# Altium PCB 1520 - 副本 (2).PcbDoc
Units mm, origin at the board's own origin, x right, y up, seen from the top; angles counter-clockwise.
Board outline 200.03 x 150.11 mm, 2 copper layers (Top Layer, Bottom Layer); 34 components, 45 nets, 202 pads, 47 vias.
Unrouted connection lines stored in the file: 2.
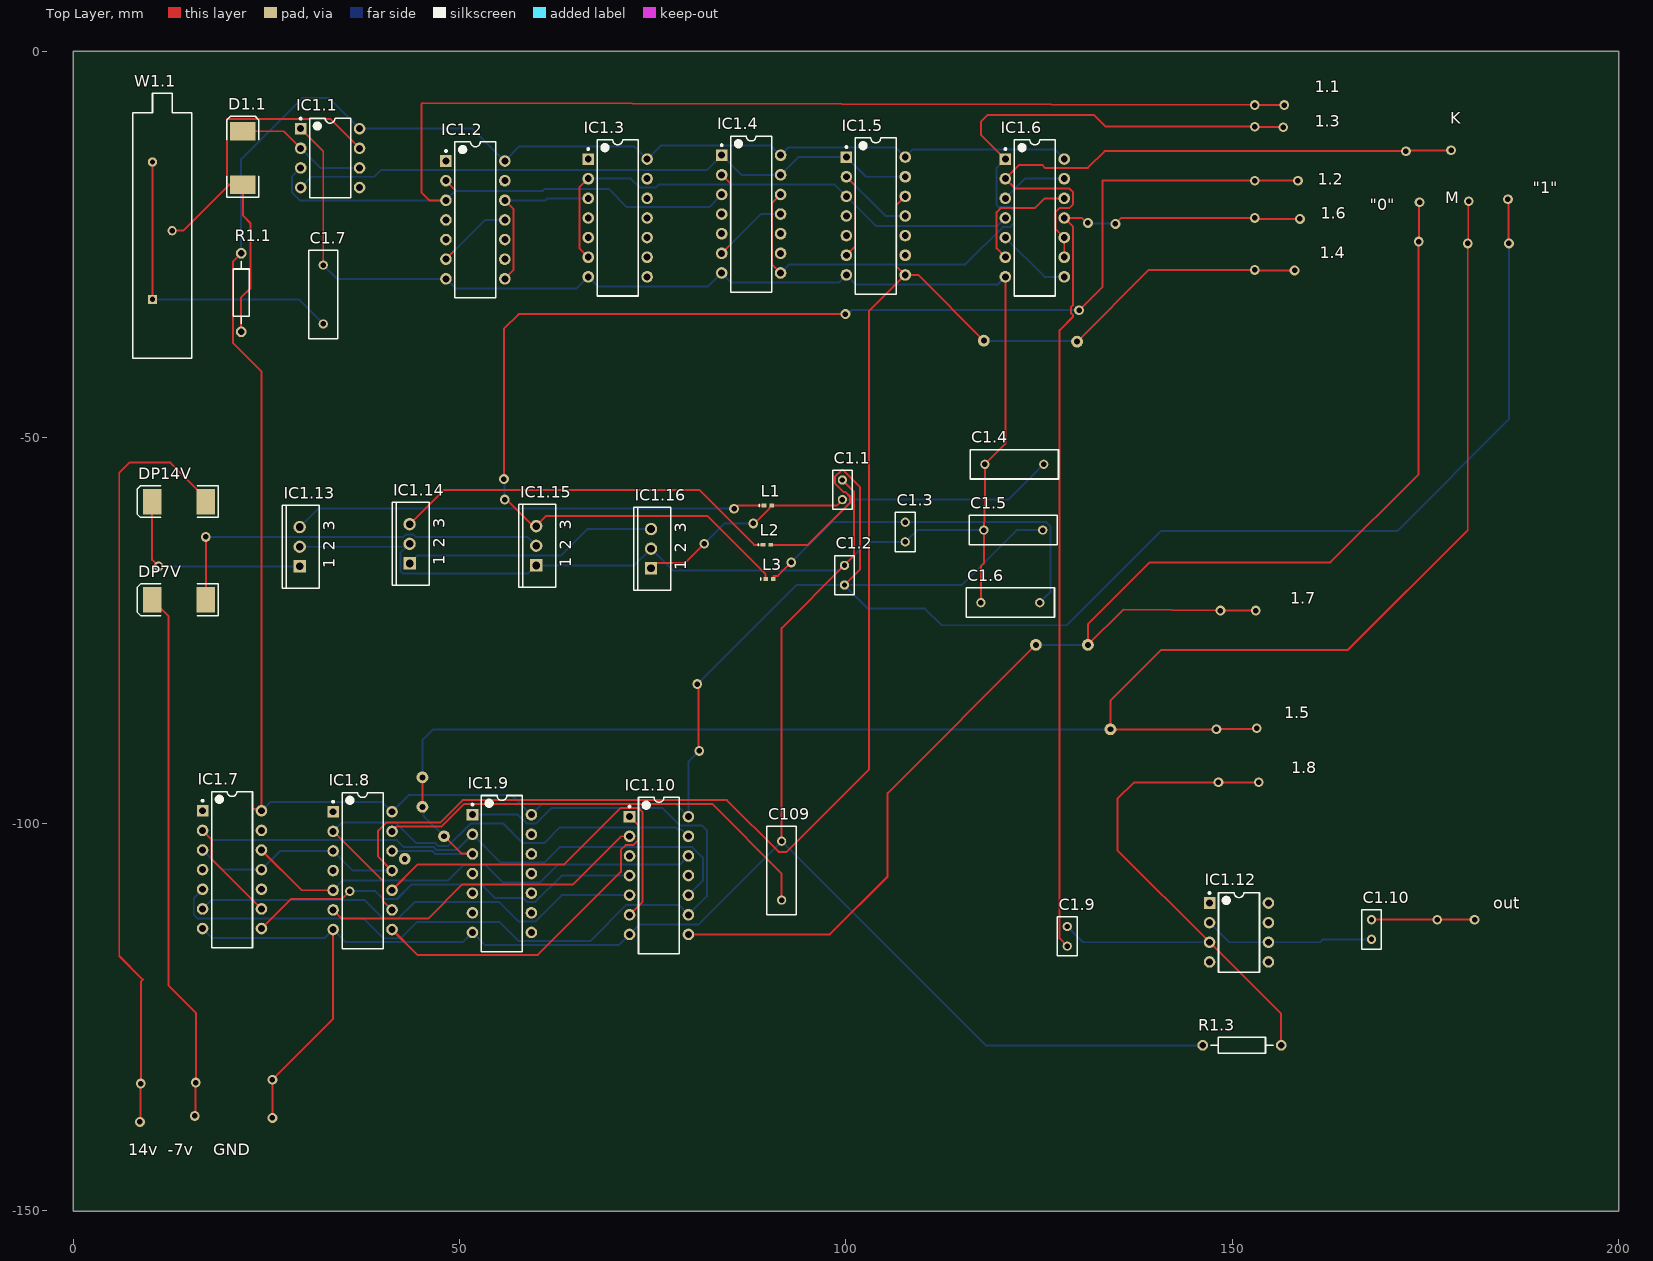
[diagram p0: Top Layer view]
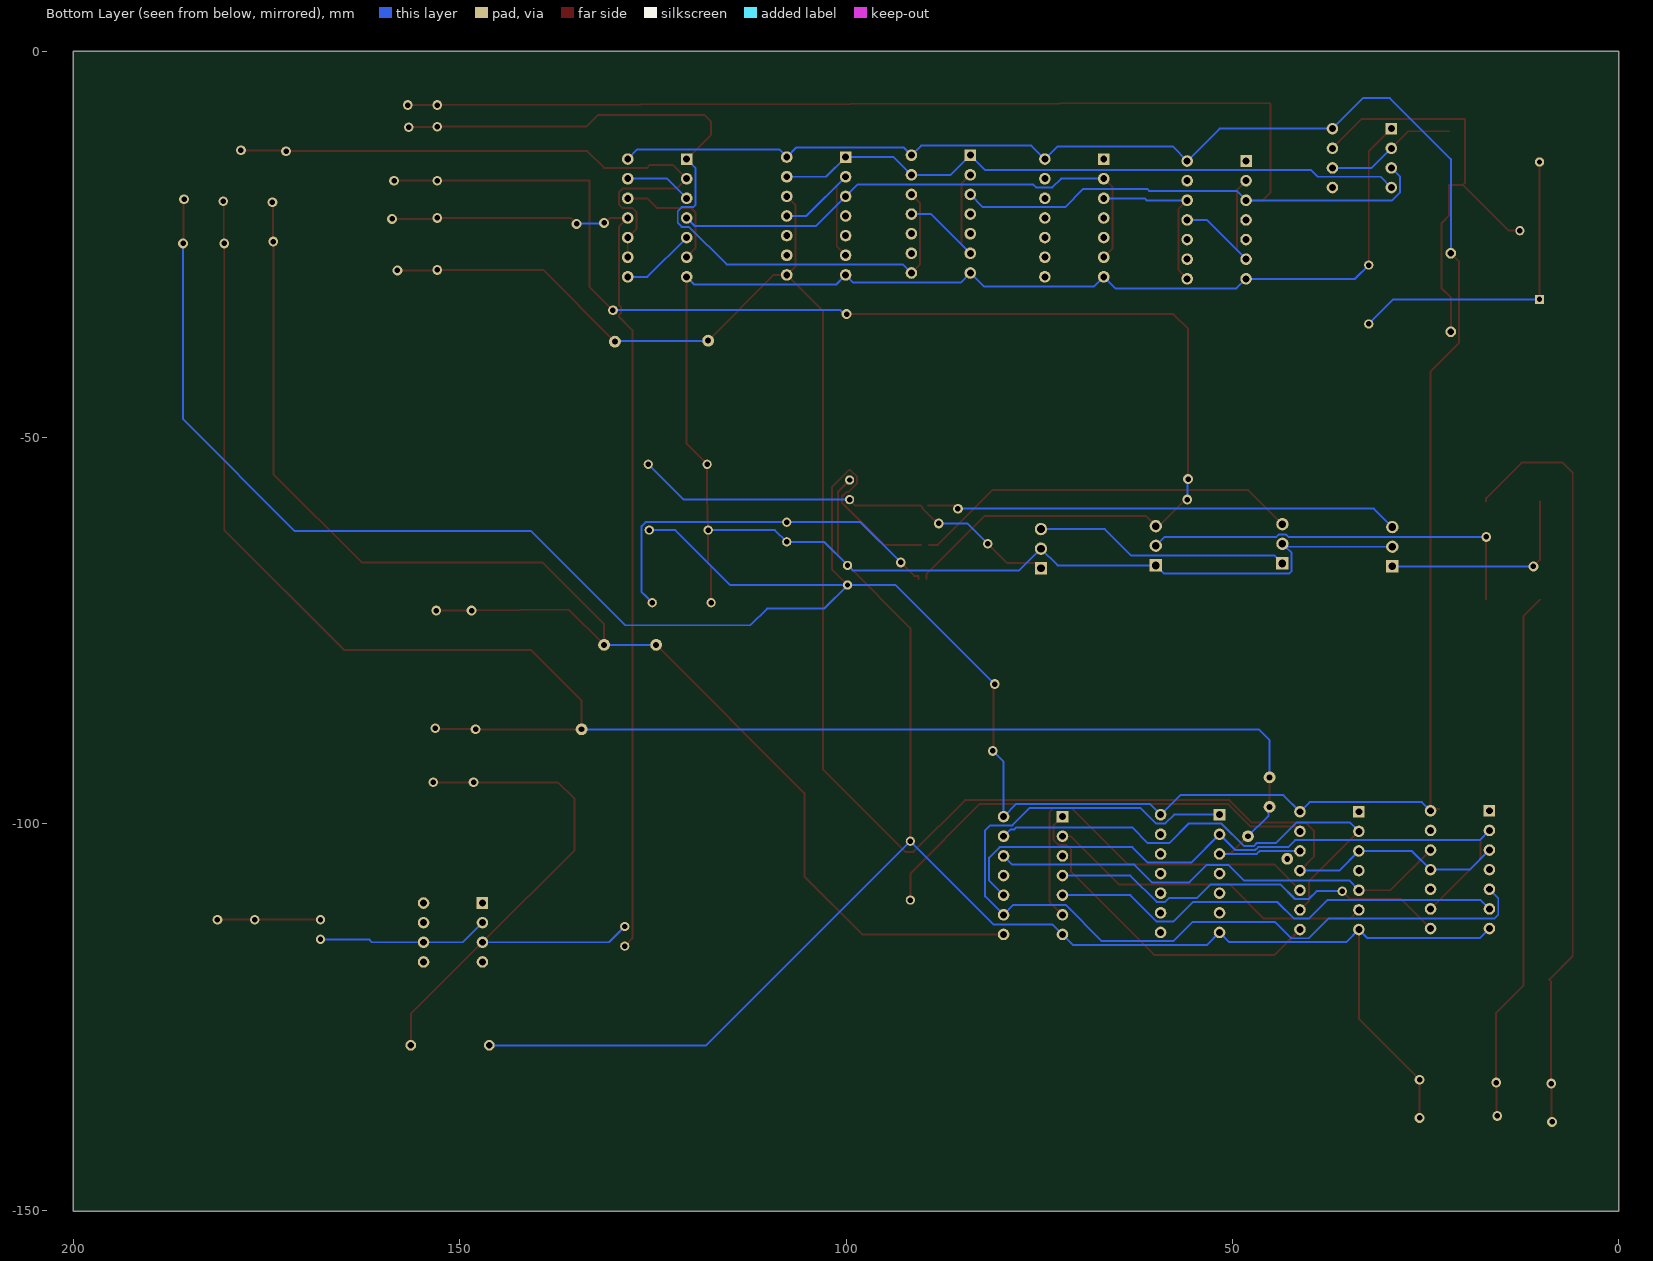
[diagram p1: Bottom Layer view, seen from below]

## Layer stack, top to bottom
Top Solder: solder mask 0.0102, Solder Resist, Dk 3.5
Top Layer: signal copper 0.0356
Dielectric 1: dielectric 0.32, FR-4, Dk 4.8
Bottom Layer: signal copper 0.0356
Bottom Solder: solder mask 0.0102, Solder Resist, Dk 3.5

## Board outline
0,-150.114 0,0 200.025,0 200.025,-0.127 200.025,-150.114

## Design rules (kind name [scope] priority, off if disabled: settings)
Clearance [All] p1: gap=0.254 ignorepadtopadclearanceinfootprint=FALSE except(0: Arc-Hole Track-Hole SMDPad-Hole THPad-Hole Via-Hole Fill-Hole Poly-Hole Region-Hole Text-Hole)
PolygonConnect [All] p1: connectstyle=Relief reliefconductorwidth=0.254 reliefentries=4 polygonreliefangle="90 Angle" airgapwidth=0.254
RoutingVias [All] p1: holewidth=0.711 width=1.27 viastyle="Through Hole" minholewidth=0.711 minwidth=1.27 maxholewidth=0.711 maxwidth=1.27
SolderMaskExpansion [All] p1: expansion=0.102
Width [All] p1: maxlimit=0.254 minlimit=0.254 preferedwidth=0.254
30 further rules are at their usual default settings.

## Components (designator, comment, footprint, x,y, rotation, side; value= is the part's Value field where it differs from the comment)
C1.1 "47" RAD-0.1 99.551,-56.769 r90 top
C1.2 "47" RAD-0.1 99.813,-67.818 r90 top
C1.3 "47" RAD-0.1 107.679,-62.23 r90 top
C1.4 "Cap" RAD-0.3 121.793,-53.467 r180 top value=0.1UF
C1.5 "Cap" RAD-0.3 121.657,-61.976 r180 top value=0.1uf
C1.6 "Cap" RAD-0.3 121.276,-71.374 r180 top value=0.1uf
C1.7 "Cap" RAD-0.3 32.368,-31.496 r90 top value=0.022
C1.9 "10.0" RAD-0.1 128.642,-114.546 r90 top
C1.10 "10.0" RAD-0.1 168.012,-113.665 r90 top
C109 "Cap" RAD-0.3 91.685,-106.045 r90 top value=0.1
D1.1 "Diode" SMC 21.954,-13.843 r90 top
DP7V "Diode" SMC 13.699,-70.993 r180 top
DP14V "Diode" SMC 13.699,-58.293 r180 top
IC1.1 "NE555" DIP-8 33.257,-13.843 r0 top
IC1.2 "74LS74" DIP-14 52.053,-21.844 r0 top
IC1.3 "74LS74" DIP-14 70.468,-21.59 r0 top
IC1.4 "74LS74" DIP-14 87.74,-21.09 r0 top
IC1.5 "74LS74" DIP-14 103.869,-21.336 r0 top
IC1.6 "74LS00" DIP-14 124.443,-21.59 r0 top
IC1.7 "74LS74" DIP-14 20.565,-105.918 r0 top
IC1.8 "74LS74" DIP-14 37.456,-106.045 r0 top
IC1.9 "74LS86" DIP-14 55.49,-106.426 r0 top
IC1.10 "74LS20" DIP-14 75.81,-106.68 r0 top
IC1.12 "741" DIP-8 150.867,-114.046 r0 top
IC1.13 "MC7812T" TO-220-AB 29.32,-64.135 r90 top
IC1.14 "MC7805T" TO-220-AB 43.544,-63.754 r90 top
IC1.15 "MC7905T" TO-220-AB 59.927,-64.008 r90 top
IC1.16 "MC7805T" TO-220-AB 74.786,-64.389 r90 top
L1 "Inductor" 0402-A 89.907,-58.801 r0 top value=68uh
L2 "Inductor" 0402-A 89.78,-63.881 r0 top value=68uh
L3 "Inductor" 0402-A 90.107,-68.326 r0 top value=68uh
R1.1 "Res2" AXIAL-0.4 21.754,-31.242 r90 top value=3.6K
R1.3 "" AXIAL-0.4 151.248,-128.651 r180 top value=27K
W1.1 "4.7K" VR3 11.54,-23.241 r90 top

## Footprints (in the part's own frame and the unit in brackets; to place one, negate y for a bottom-side part, rotate by r counter-clockwise, add the part's x,y. Pads: shape width x height; smd on the part's side, far side on the other; paste and mask are expansions set on the pad)
0402-A [mm] "Chip Inductor, Body 1.0x0.5mm, IPC High Density"
  rect 0.6x0.5 smd: 1(-0.5,0) 2(0.5,0)
  silkscreen extent -1.1,-0.15 -1.1,0.15, body extent -0.55,-0.3 0.55,0.3, height 0.55
AXIAL-0.4 [mm] "Axial Device, Thru-Hole; 2 Leads; 0.4 in Pin Spacing"
  round 1.4 hole 0.85: 1(-5.08,0) 2(5.08,0)
  silkscreen extent -4.06,-1.02 4.06,1.02
DIP-8 [mm] "DIP; 8 Leads; Row Spacing 7.62 mm; Pitch 2.54 mm"
  rect 1.5x1.5 hole 0.9: 1(-3.81,3.81)
  round 1.5 hole 0.9: 2(-3.81,1.27) 3(-3.81,-1.27) 4(-3.81,-3.81) 5(3.81,-3.81) 6(3.81,-1.27) 7(3.81,1.27) 8(3.81,3.81)
  silkscreen extent -3.93,-5.15 2.65,5.23, body extent -3.6,-5.15 3.6,5.15, height 5.08
DIP-14 [mm] "DIP; 14 Leads; Row Spacing 7.62 mm; Pitch 2.54 mm"
  rect 1.5x1.5 hole 0.9: 1(-3.81,7.62)
  round 1.5 hole 0.9: 2(-3.81,5.08) 3(-3.81,2.54) 4(-3.81,0) 5(-3.81,-2.54) 6(-3.81,-5.08) 7(-3.81,-7.62) 8(3.81,-7.62) 9(3.81,-5.08) 10(3.81,-2.54) 11(3.81,0) 12(3.81,2.54) 13(3.81,5.08) 14(3.81,7.62)
  silkscreen extent -3.93,-10.1 2.65,10.1, body extent -3.6,-10.1 3.6,10.1, height 5.08
RAD-0.1 [mm] "Radial Cap, Thru-Hole; 2 Leads; 0.1 in Pin Spacing"
  round 1.2 hole 0.7: 1(-1.27,0) 2(1.27,0)
  silkscreen extent -2.54,-1.27 2.54,1.27
RAD-0.3 [mm] "Radial Cap, Thru-Hole; 2 Leads; 0.3 in Pin Spacing"
  round 1.2 hole 0.7: 1(-3.81,0) 2(3.81,0)
  silkscreen extent -5.71,-1.91 5.72,1.91
SMC [mm] "DO-214-AB/SMC; 2 C-Bend Leads; Body 7.9 x 5.9 mm, inc. leads (LxW)"
  rect 2.4x3.3 smd: 1(-3.475,0) 2(3.475,0)
  silkscreen extent -5.08,-2.05 5.42,2.05
TO-220-AB [mm] "TO, Thru-Hole, Vertical, Heatsink Mounted; 3 In-Line Leads; Pitch 2.54 mm"
  rect 1.6x1.6 hole 1: 1(-2.54,0)
  round 1.6 hole 1: 2(0,0) 3(2.54,0)
  silkscreen extent -5.35,-2.55 5.35,2.25
VR3 [mm] "Thru-Hole; 3 Leads"
  rect 1.2x1.2 hole 0.7: 1(-8.89,1.27)
  round 1.2 hole 0.7: 2(0,-1.27) 3(8.89,1.27)
  silkscreen extent -16.51,-3.81 17.78,3.81

## Part data
C1.1 C1.2 C1.3 C1.9 C1.10: library part ELECTRO1, "Electrolytic Capacitor"
C1.4 C1.5 C1.6 C1.7 C109: "Capacitor", LatestRevisionDate=17-Jul-2002, LatestRevisionNote="Re-released for DXP Platform.", PackageDescription="Radial Cap, Thru-Hole; 2 Leads; 0.3 in Pin Spacing", PackageReference=RAD-0.3, Published=8-Jun-2000, Publisher="Altium Limited"
D1.1 DP7V DP14V: "Default Diode", Code_JEDEC=DO-214-AB, LatestRevisionDate=17-Jul-2002, LatestRevisionNote="Re-released for DXP Platform.", PackageDescription="DO-214-AB/SMC; 2 C-Bend Leads; Body 7.9 x 5.9 mm, inc. leads (LxW)", PackageReference=SMC, PackageVersion=Sep-1996, Published=8-Jun-2000, Publisher="Altium Limited"
IC1.1: library part 555
R1.1: "Resistor", LatestRevisionDate=17-Jul-2002, LatestRevisionNote="Re-released for DXP Platform.", PackageDescription="Axial Device, Thru-Hole; 2 Leads; 0.4 in Pin Spacing", PackageReference=AXIAL-0.4, Published=8-Jun-2000, Publisher="Altium Limited"
R1.3: library part Res2, "Resistor", LatestRevisionDate=17-Jul-2002, LatestRevisionNote="Re-released for DXP Platform.", PackageDescription="Axial Device, Thru-Hole; 2 Leads; 0.4 in Pin Spacing", PackageReference=AXIAL-0.4, Published=8-Jun-2000, Publisher="Altium Limited"
W1.1: library part POT2, "Potentiometer"
L1 L2 L3: Code_IEC=1005, Code_JEITA=0402, LatestRevisionDate=29-May-2009, LatestRevisionNote="IPC-7351 Footprint Added.", PackageDescription="Chip Inductor", PackageReference=0402-A, Published=8-Jun-2000, Publisher="Altium Limited"

## Free pads (board coordinates)
  round 1.524 hole 0.762: 3(117.847,-37.465) 4(129.912,-37.592) 5(42.917,-104.521) 6(134.23,-87.757) 7(47.997,-101.6) 8(45.203,-97.79) 9(45.203,-93.98) 19(124.587,-76.835) 20(131.318,-76.835)

## Via types
v1: diameter 1.27, hole 0.711, Top Layer to Bottom Layer, 47 vias

## Nets (pads, with @x,y where several pads share a name; then routed paths per layer and width w, separated by ;. In a path a pad name is that pad's centre, name@x,y a point inside that pad or via, vN(x,y) a via of type N, cw(c..) or ccw(c..) an arc to the next point about the centre after c; other vN are vias at no path point)
+12: 
+14: DP14V.1 | length 99.5
  Top Layer w0.254: v1(8.636,-138.557) 8.7,-138.493 8.7,-133.667 v1(8.763,-133.604) 8.763,-120.396 9.017,-120.142 5.969,-117.094 5.969,-54.541 7.268,-53.242 12.573,-53.242 17.174,-57.843 DP14V.1
-7: DP7V.2 | length 69.2
  Top Layer w0.254: DP7V.2 12.319,-73.088 12.319,-120.904 15.875,-124.46 v1(15.875,-133.477) 15.811,-133.541 15.811,-137.731 v1(15.748,-137.795)
GND: C1.1.2 C1.2.2 C1.3.1 C1.4.2 C1.5.2 C1.6.2 C1.7.2 C109.2 IC1.1.1 IC1.2.7 IC1.3.7 IC1.4.7 IC1.5.7 IC1.6.7 IC1.7.7 IC1.8.7 IC1.9.7 IC1.10.7 IC1.10.8 IC1.13.2 IC1.14.2 IC1.15.1 IC1.16.2 pad.19 pad.20 R1.3.2 | length 667.2
  Top Layer w0.254: v1(25.781,-138.049) v1(25.781,-133.096) 33.646,-125.231 IC1.8.7 ; IC1.1.1 32.368,-12.954 C1.7.2 ; IC1.10.8 97.917,-114.3 105.41,-106.807 105.41,-96.012 pad.19 ; C109.2 91.685,-74.676 C1.2.2 101.04,-65.321 101.04,-56.988 C1.1.2 ; C1.6.2 117.466,-66.675 117.847,-66.294 C1.5.2 117.983,-57.598 C1.4.2 120.633,-50.817 IC1.6.7 ; v1(153.035,-72.39) v1(148.463,-72.39) 135.89,-72.263 pad.20 131.318,-74.168 139.319,-66.167 162.687,-66.167 174.117,-54.737 v1(174.117,-24.638) 174.18,-24.575 174.18,-19.621 v1(174.244,-19.558)
  Bottom Layer w0.254: IC1.7.7 18,-114.783 32.528,-114.783 IC1.8.7 35.285,-115.304 50.422,-115.304 IC1.9.7 53.319,-115.685 70.615,-115.685 IC1.10.7 73.27,-113.03 80.89,-113.03 C109.2 118.101,-128.651 R1.3.2 ; IC1.13.2 IC1.14.2@43.163,-64.135 ; C1.7.2 34.146,-29.464 IC1.2.7 49.488,-30.709 65.159,-30.709 IC1.3.7 67.903,-30.455 82.185,-30.455 IC1.4.7 85.167,-29.947 99.068,-29.947 IC1.5.7 101.304,-30.201 119.642,-30.201 IC1.6.7 ; IC1.14.2 IC1.14.2@43.163,-64.135 ; C1.5.2 109.203,-61.976 C1.3.1 102.861,-63.5 C1.2.2 99.165,-67.196 77.593,-67.196 IC1.16.2 72.627,-66.548 IC1.15.1 58.886,-67.589 42.638,-67.589 42.358,-67.31 42.358,-64.94 IC1.14.2@43.163,-64.135 ; pad.19 pad.20
NetC1.1_1: C1.1.1 C1.4.1 IC1.16.1 L1.2 | length 56.5
  Top Layer w0.254: IC1.16.1 75.459,-66.256 79.159,-66.256 v1(81.661,-63.754) ; v1(88.014,-61.117) 88.18,-61.117 90.088,-59.209 90.088,-59.07 90.357,-58.801 L1.2 98.789,-58.801 C1.1.1
  Bottom Layer w0.254: v1(81.661,-63.754) 84.298,-61.117 v1(88.014,-61.117) ; C1.1.1 121.031,-58.039 C1.4.1
NetC1.2_1: 
NetC1.3_2: C1.3.2 C1.6.1 L3.2 | length 49.8
  Top Layer w0.254: L3.2 90.607,-67.905 91.191,-67.905 v1(92.93,-66.167)
  Bottom Layer w0.254: v1(92.93,-66.167) 98.137,-60.96 C1.3.2 125.95,-60.96 126.458,-61.468 126.458,-70.002 125.95,-70.51 C1.6.1
NetC1.7_1: C1.7.1 W1.1.1 W1.1.3 | length 41.2
  Top Layer w0.254: W1.1.1 W1.1.3
  Bottom Layer w0.254: W1.1.1 29.193,-32.131 C1.7.1
NetC1.9_1: C1.9.1 IC1.6.11 | length 127.3
  Top Layer w0.254: C1.9.1 127.651,-114.825 127.651,-36.093 129.404,-34.341 129.404,-34.203 129.15,-33.949 129.15,-33.107 129.404,-32.853 129.404,-22.741 IC1.6.11 130.519,-21.59 131.154,-22.225 v1(131.321,-22.225) ; v1(134.874,-22.352) 135.636,-21.59 v1@152.781,-21.59 ; v1@152.4,-21.653 v1@152.463,-21.59 ; v1@152.4,-21.59 v1@152.463,-21.653 ; v1(152.908,-21.59) 153.035,-21.717 v1(158.75,-21.717)
  Bottom Layer w0.254: v1(131.321,-22.225) 131.385,-22.288 134.81,-22.288 v1(134.874,-22.352)
NetC1.9_2: C1.9.2 IC1.12.3 R1.3.1 | length 79.1
  Top Layer w0.254: v1(153.416,-94.615) v1(148.209,-94.615) 137.287,-94.615 135.128,-96.774 135.128,-103.387 IC1.12.3 156.328,-124.587 R1.3.1
  Bottom Layer w0.254: C1.9.2 130.682,-115.316 IC1.12.3
NetC1.10_1: C1.10.1 IC1.12.2 IC1.12.6 | length 22.2
  Bottom Layer w0.254: IC1.12.2 149.597,-115.316 IC1.12.6 161.357,-115.316 161.738,-114.935 C1.10.1
NetC1.10_2: C1.10.2 | length 13.3
  Top Layer w0.254: C1.10.2 v1(176.53,-112.395) v1(181.356,-112.395)
NetC109_1: C109.1 IC1.8.13 | length 59
  Top Layer w0.254: IC1.8.13 41.901,-100.33 47.699,-100.33 50.608,-97.421 82.68,-97.421 91.685,-106.426 C109.1
NetD1.1_1: D1.1.1 IC1.1.7 R1.1.1 W1.1.2 | length 58.9
  Top Layer w0.254: W1.1.2 14.261,-23.241 20.184,-17.318 ; R1.1.1 21.754,-31.856 22.953,-30.658 22.953,-22.258 21.954,-21.26 D1.1.1 20.184,-17.318 ; IC1.1.7 33.257,-8.763 19.905,-8.763 19.905,-17.039 20.184,-17.318
NetD1.1_2: D1.1.2 IC1.1.2 IC1.1.6 | length 17.1
  Top Layer w0.254: D1.1.2 27.242,-10.368 IC1.1.2
  Bottom Layer w0.254: IC1.1.2 31.987,-15.113 IC1.1.6
NetDP7V_1: DP7V.1 IC1.15.2 | length 51.6
  Top Layer w0.254: DP7V.1 v1(17.174,-62.865)
  Bottom Layer w0.254: v1(17.174,-62.865) 42.763,-62.865 43.055,-62.573 44.033,-62.573 44.325,-62.865 58.784,-62.865 IC1.15.2
NetDP14V_2: DP14V.2 IC1.13.1 | length 27
  Top Layer w0.254: DP14V.2 10.224,-65.834 v1(11.065,-66.675)
  Bottom Layer w0.254: v1(11.065,-66.675) IC1.13.1
NetIC1.1_3: IC1.1.3 IC1.2.3 IC1.4.3 | length 188.7
  Top Layer w0.254: IC1.2.3 46.092,-19.304 45.076,-18.288 45.076,-6.858 45.225,-6.709 153.67,-6.985 v1(156.718,-6.985)
  Bottom Layer w0.254: IC1.1.3 28.312,-16.248 28.312,-18.288 29.328,-19.304 IC1.2.3 49.462,-18.085 60.799,-18.085 61.053,-17.831 69.307,-17.831 71.657,-20.181 82.299,-20.181 IC1.4.3
  other v1: 152.908,-6.985
NetIC1.1_4: IC1.1.4 IC1.4.1 IC1.4.13 IC1.5.1 IC1.5.13 | length 83
  Bottom Layer w0.254: IC1.1.4 30.844,-16.256 38.955,-16.256 39.844,-15.367 82.033,-15.367 IC1.4.1 86.47,-16.01 IC1.4.13 93.844,-13.716 IC1.5.1 102.599,-16.256 IC1.5.13
NetIC1.2_2: IC1.2.2 IC1.2.6 IC1.2.11 | length 20.8
  Top Layer w0.254: IC1.2.6 49.394,-25.773 49.394,-17.915 IC1.2.2
  Bottom Layer w0.254: IC1.2.6 53.323,-21.844 IC1.2.11
NetIC1.2_8: IC1.2.8 IC1.2.12 IC1.3.3 | length 22
  Top Layer w0.254: IC1.2.8 57.014,-28.313 57.014,-20.455 IC1.2.12
  Bottom Layer w0.254: IC1.2.12 61.129,-19.304 61.383,-19.05 IC1.3.3
NetIC1.3_2: IC1.3.2 IC1.3.6 IC1.5.3 IC1.6.4 | length 68.3
  Top Layer w0.254: IC1.3.6 65.523,-25.535 65.523,-17.645 IC1.3.2
  Bottom Layer w0.254: IC1.3.2 72.178,-16.51 73.309,-17.641 75.404,-17.641 75.773,-17.272 98.535,-17.272 IC1.5.3 103.869,-22.606 119.617,-22.606 IC1.6.4
NetIC1.4_2: IC1.4.2 IC1.4.6 IC1.4.11 | length 20.8
  Top Layer w0.254: IC1.4.6 85.081,-25.019 85.081,-17.161 IC1.4.2
  Bottom Layer w0.254: IC1.4.6 89.01,-21.09 IC1.4.11
NetIC1.4_8: IC1.4.8 IC1.4.12 IC1.6.1 | length 100.9
  Top Layer w0.254: IC1.4.8 90.415,-27.575 90.415,-19.685 IC1.4.12 ; IC1.6.1 117.458,-10.795 117.458,-9.152 118.355,-8.255 132.071,-8.255 133.595,-9.779 v1@152.4,-9.779 ; v1@152.463,-9.842 v1@152.4,-9.779 ; v1@153.28,-9.779 v1(152.908,-9.779) v1@152.4,-9.779 ; v1@153.344,-9.842 153.407,-9.906 153.471,-9.842 v1(156.591,-9.842)
  Bottom Layer w0.254: IC1.4.8 92.65,-27.61 115.459,-27.61 120.336,-22.733 121.276,-22.733 121.784,-22.225 121.784,-20.701 121.276,-20.193 119.752,-20.193 119.498,-19.939 119.498,-15.105 IC1.6.1
NetIC1.5_2: IC1.5.2 IC1.5.6 IC1.5.11 | length 20.8
  Top Layer w0.254: IC1.5.6 101.21,-25.265 101.21,-17.407 IC1.5.2
  Bottom Layer w0.254: IC1.5.2 105.139,-21.336 IC1.5.11
NetIC1.5_8: IC1.5.8 IC1.5.12 IC1.7.3 IC1.7.11 IC1.8.3 IC1.8.11 pad.3 pad.4 | length 240.8
  Top Layer w0.254: IC1.8.11 39.463,-104.242 39.463,-100.863 40.504,-99.822 47.489,-99.822 50.398,-96.913 84.585,-96.913 91.304,-103.632 92.32,-103.632 103.013,-92.939 103.013,-33.622 IC1.5.8 ; IC1.5.12 106.544,-19.931 106.544,-27.821 IC1.5.8 ; pad.3 109.338,-28.956 IC1.5.8 ; pad.4 139.183,-28.321 v1@153.289,-28.321 ; v1@152.4,-28.321 v1@152.463,-28.384 ; v1@153.352,-28.384 v1(158.052,-28.384)
  Bottom Layer w0.254: IC1.7.3 19.295,-105.918 IC1.7.11 26.788,-103.505 IC1.8.3 36.186,-106.045 IC1.8.11 ; pad.3 117.911,-37.529 129.849,-37.529 pad.4
  other v1: 152.908,-28.321
NetIC1.6_2: IC1.6.2 IC1.6.9 IC1.6.10 | length 79.6
  Top Layer w0.254: IC1.6.9 IC1.6.10 127.118,-22.995 127.118,-20.828 127.626,-20.32 128.896,-20.32 129.404,-19.812 129.404,-18.288 128.896,-17.78 121.903,-17.78 IC1.6.2 122.411,-14.732 125.382,-14.732 125.751,-15.101 131.321,-15.101 133.468,-12.954 v1(172.466,-12.954) 172.529,-12.89 178.244,-12.89 v1(178.308,-12.827)
NetIC1.6_3: IC1.6.3 IC1.6.13 | length 8.7
  Bottom Layer w0.254: IC1.6.3 123.173,-16.51 IC1.6.13
NetIC1.6_5: IC1.6.5 IC1.6.8 | length 9.7
  Bottom Layer w0.254: IC1.6.5 125.713,-29.21 IC1.6.8
NetIC1.6_6: IC1.6.6 IC1.6.12 | length 15.8
  Top Layer w0.254: IC1.6.6 119.498,-25.535 119.498,-20.828 120.006,-20.32 124.451,-20.32 125.721,-19.05 IC1.6.12
NetIC1.7_2: IC1.7.2 IC1.7.9 IC1.9.2 IC1.10.10 | length 88.5
  Top Layer w0.254: IC1.7.2 17.898,-101.981 17.898,-104.521 IC1.7.9
  Bottom Layer w0.254: IC1.7.2 18.025,-102.108 41.909,-102.108 42.798,-102.997 46.683,-102.997 47.064,-103.378 49.648,-103.378 IC1.9.2 55.351,-105.017 60.939,-105.017 62.959,-102.997 80.128,-102.997 81.5,-104.369 81.5,-107.34 IC1.10.10
NetIC1.7_5: IC1.7.5 IC1.9.1 IC1.10.9 | length 118.2
  Bottom Layer w0.254: IC1.7.5 15.612,-109.601 15.612,-111.76 16.12,-112.268 37.607,-112.268 40.135,-114.796 42.397,-114.796 44.519,-112.674 55.158,-112.674 57.661,-115.177 66.907,-115.177 71.594,-110.49 78.35,-110.49 IC1.10.9 82.008,-109.372 82.008,-100.826 81.373,-100.191 78.477,-100.191 76.215,-97.929 61.93,-97.929 59.922,-99.937 58.678,-99.937 57.547,-98.806 IC1.9.1
NetIC1.7_6: IC1.7.6 IC1.10.5 | length 60.1
  Bottom Layer w0.254: IC1.7.6 17.898,-109.855 37.734,-109.855 40.135,-112.256 42.028,-112.256 44.175,-110.109 55.133,-110.109 57.661,-112.637 59.808,-112.637 63.225,-109.22 IC1.10.5
NetIC1.7_8: IC1.7.8 IC1.10.4 | length 53.2
  Top Layer w0.254: IC1.7.8 28.185,-109.728 34.789,-109.728 v1(35.805,-108.712)
  Bottom Layer w0.254: v1(35.805,-108.712) 39.119,-108.712 40.123,-109.716 41.913,-109.716 43.794,-107.835 52.823,-107.835 54.564,-109.576 58.182,-109.576 58.704,-110.097 59.808,-110.097 63.225,-106.68 IC1.10.4
NetIC1.7_12: IC1.7.12 IC1.8.5 IC1.10.12 | length 61.1
  Top Layer w0.254: IC1.7.12 29.582,-108.585 IC1.8.5
  Bottom Layer w0.254: IC1.8.5 34.916,-107.315 48.529,-107.315 50.549,-105.295 53.319,-105.295 55.581,-107.557 60.431,-107.557 62.705,-105.283 78.477,-105.283 IC1.10.12
NetIC1.8_2: IC1.8.2 IC1.8.9 IC1.10.13 | length 64.6
  Top Layer w0.254: IC1.8.2 40.123,-107.442 40.123,-109.982 IC1.8.9
  Bottom Layer w0.254: IC1.8.2 34.777,-99.834 41.734,-99.834 44.389,-102.489 46.894,-102.489 47.275,-102.87 48.505,-102.87 51.426,-99.949 55.641,-99.949 58.169,-102.477 60.939,-102.477 62.959,-100.457 77.981,-100.457 78.223,-100.699 78.719,-100.699 IC1.10.13
NetIC1.8_6: IC1.8.6 IC1.10.2 | length 43.2
  Top Layer w0.254: IC1.8.6 34.789,-112.268 45.94,-112.268 50.385,-107.823 64.696,-107.823 70.919,-101.6 IC1.10.2
NetIC1.8_8: IC1.8.8 IC1.10.1 | length 44.6
  Top Layer w0.254: IC1.8.8 44.543,-116.942 60.138,-116.942 70.869,-106.211 70.869,-103.366 71.492,-102.743 72.508,-102.743 73.143,-102.108 73.143,-100.203 IC1.10.1
NetIC1.8_10: IC1.8.10 IC1.10.6 | length 51
  Top Layer w0.254: IC1.8.10 44.619,-105.232 63.566,-105.232 70.869,-97.929 73.131,-97.929 73.651,-98.449 73.651,-110.109 IC1.10.6
NetIC1.8_12: IC1.8.12 IC1.9.3 pad.5 pad.6 pad.7 pad.8 pad.9 | length 239.1
  Top Layer w0.254: pad.8 pad.9 ; pad.7 50.205,-103.808 51.602,-103.808 IC1.9.3 ; v1(153.162,-87.63) 153.099,-87.694 148.01,-87.694 v1(147.946,-87.757) pad.6 134.23,-84.074 140.834,-77.47 164.973,-77.47 180.467,-61.976 v1(180.467,-24.892) 180.53,-24.828 180.53,-19.494 v1(180.594,-19.431)
  Bottom Layer w0.254: IC1.8.12 46.473,-103.505 46.854,-103.886 IC1.9.3 ; pad.8 45.33,-97.917 45.33,-98.933 pad.7 ; pad.9 45.203,-89.154 46.6,-87.757 pad.6
NetIC1.13_3: IC1.13.3 L1.1 | length 61.2
  Top Layer w0.254: v1(85.538,-59.207) 85.945,-58.801 L1.1
  Bottom Layer w0.254: IC1.13.3 31.708,-59.207 v1(85.538,-59.207)
NetIC1.14_1: IC1.14.1 IC1.16.3 | length 33.1
  Bottom Layer w0.254: IC1.14.1 44.56,-65.278 63.085,-65.278 66.514,-61.849 IC1.16.3
NetIC1.14_3: IC1.14.3 L2.1 | length 50.5
  Top Layer w0.254: IC1.14.3 47.938,-56.82 81.068,-56.82 88.129,-63.881 L2.1
NetIC1.15_3: IC1.15.3 L3.1 | length 180.3
  Top Layer w0.254: v1(55.744,-55.372) 55.744,-35.941 57.649,-34.036 v1(99.94,-34.036) ; v1(55.863,-58.039) 56.138,-58.039 59.567,-61.468 IC1.15.3 61.248,-60.147 82.033,-60.147 89.607,-67.721 L3.1 ; v1(130.166,-33.528) 133.223,-30.471 133.223,-16.764 153.797,-16.764 v1(158.496,-16.764)
  Bottom Layer w0.254: v1(55.744,-55.372) 55.804,-55.432 55.804,-57.979 v1(55.863,-58.039) ; v1(99.94,-34.036) 100.215,-34.036 100.723,-33.528 v1(130.166,-33.528)
  other v1: 152.908,-16.764
VCC: C1.2.1 C1.5.1 IC1.1.8 IC1.2.14 IC1.3.14 IC1.4.14 IC1.5.14 IC1.6.14 IC1.7.14 IC1.8.14 IC1.9.14 IC1.10.14 L2.2 R1.1.2 | length 498
  Top Layer w0.254: R1.1.2 20.667,-27.249 20.667,-37.744 24.375,-41.453 IC1.7.14 24.174,-98.097 23.244,-98.097 ; v1(80.772,-81.915) 80.899,-82.042 80.899,-90.424 v1(81.026,-90.551) ; L2.2 95.096,-63.881 100.532,-58.445 100.532,-57.633 99.957,-57.058 99.723,-57.058 98.57,-55.905 98.57,-55.073 99.436,-54.207 99.647,-54.207 101.854,-56.415 101.854,-67.047 C1.2.1 ; v1(185.674,-19.177) 185.737,-19.241 185.737,-24.828 v1(185.801,-24.892)
  Bottom Layer w0.254: R1.1.2 21.754,-13.967 29.625,-6.096 33.13,-6.096 IC1.1.8 51.672,-10.033 IC1.2.14 57.756,-12.331 72.639,-12.331 IC1.3.14 76.031,-12.217 90.297,-12.217 IC1.4.14 92.549,-12.471 106.434,-12.471 IC1.5.14 108.67,-12.725 127.008,-12.725 IC1.6.14 ; IC1.7.14 25.493,-97.18 40.021,-97.18 IC1.8.14 43.425,-96.266 56.76,-96.266 IC1.9.14 60.685,-97.421 77.981,-97.421 IC1.10.14 79.62,-91.957 v1(81.026,-90.551) ; v1(80.772,-81.915) 93.599,-69.088 C1.2.1 ; C1.5.1 122.105,-61.976 114.993,-69.088 C1.2.1 ; v1(185.801,-24.892) 185.801,-47.625 171.323,-62.103 140.741,-62.103 128.549,-74.295 112.391,-74.295 110.232,-72.136 102.861,-72.136 C1.2.1
pads on no net: IC1.1.5 IC1.2.1 IC1.2.4 IC1.2.5 IC1.2.9 IC1.2.10 IC1.2.13 IC1.3.1 IC1.3.4 IC1.3.5 IC1.3.8 IC1.3.9 IC1.3.10 IC1.3.11 IC1.3.12 IC1.3.13 IC1.4.4 IC1.4.5 IC1.4.9 IC1.4.10 IC1.5.4 IC1.5.5 IC1.5.9 IC1.5.10 IC1.7.1 IC1.7.4 IC1.7.10 IC1.7.13 IC1.8.1 IC1.8.4 IC1.9.4 IC1.9.5 IC1.9.6 IC1.9.8 IC1.9.9 IC1.9.10 IC1.9.11 IC1.9.12 IC1.9.13 IC1.10.3 IC1.10.11 IC1.12.1 IC1.12.4 IC1.12.5 IC1.12.7 IC1.12.8

## Silkscreen, mask and mechanical layers (free items; w line width, h text height)
Top Overlay:
  text "1.1" at 160.655,-5.334 h1.52
  text "K" at 178.181,-9.398 h1.52
  text "1.3" at 160.655,-9.779 h1.52
  text "1.2" at 161.036,-17.272 h1.52
  text "\"1\"" at 188.849,-18.415 h1.52
  text "M" at 177.546,-19.685 h1.52
  text "\"0\"" at 167.767,-20.574 h1.52
  text "1.6" at 161.417,-21.717 h1.52
  text "1.4" at 161.29,-26.797 h1.52
  text "1.7" at 157.48,-71.501 h1.52
  text "1.5" at 156.718,-86.36 h1.52
  text "1.8" at 157.607,-93.472 h1.52
  text "out" at 183.769,-110.998 h1.52
  text "14v  -7v    GND" at 7.112,-142.875 h1.52
Drill Drawing:
  lines w0.254: 208.661,-5.588 208.661,-5.461

## Text inside footprints (layer, text, board x,y; h text height)
IC1.13: Top Overlay "1" at 33.845,-66.925 h1.5 r90; Top Overlay "2" at 33.845,-64.635 h1.5 r90; Top Overlay "3" at 33.845,-62.095 h1.5 r90
IC1.14: Top Overlay "1" at 48.069,-66.544 h1.5 r90; Top Overlay "2" at 48.069,-64.254 h1.5 r90; Top Overlay "3" at 48.069,-61.714 h1.5 r90
IC1.15: Top Overlay "1" at 64.452,-66.798 h1.5 r90; Top Overlay "2" at 64.452,-64.508 h1.5 r90; Top Overlay "3" at 64.452,-61.968 h1.5 r90
IC1.16: Top Overlay "1" at 79.311,-67.179 h1.5 r90; Top Overlay "2" at 79.311,-64.889 h1.5 r90; Top Overlay "3" at 79.311,-62.349 h1.5 r90